# Altium PCB Sensor shoot.PcbDoc
Units mm, origin at the board's own origin, x right, y up, seen from the top; angles counter-clockwise.
Board outline 29.97 x 10.67 mm, 2 copper layers (Top Layer, Bottom Layer); 1 components, 3 nets, 10 pads, 0 vias.
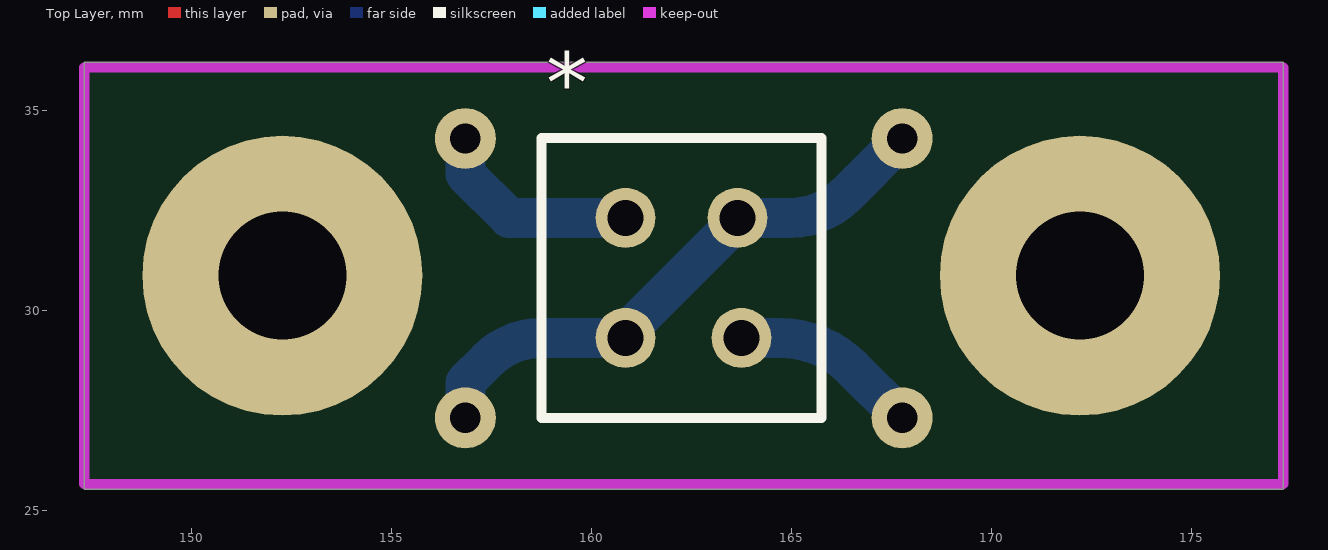
[diagram p0: Top Layer view]
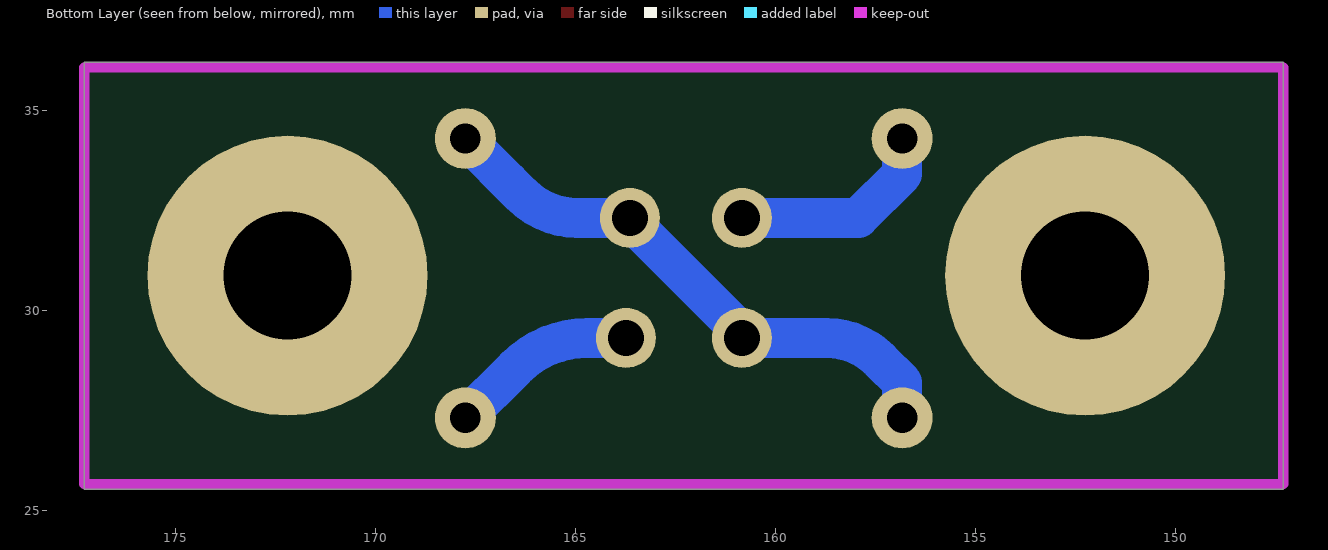
[diagram p1: Bottom Layer view, seen from below]

## Layer stack, top to bottom
Top Layer: signal copper 0.0356
Dielectric: dielectric 0.32, FR-4, Dk 4.8
Bottom Layer: signal copper 0.0356

## Board outline
147.32,25.527 147.32,36.195 177.292,36.195 177.292,25.527 147.32,25.527

## Design rules (kind name [scope] priority, off if disabled: settings)
Clearance [All] p1: gap=0.254
PolygonConnect [All] p1: connectstyle=Relief reliefconductorwidth=0.254 reliefentries=4 polygonreliefangle="90 Angle" airgapwidth=0.254
RoutingVias [All] p1: holewidth=0.711 width=1.27 viastyle="Through Hole" minholewidth=0.711 minwidth=1.27 maxholewidth=0.711 maxwidth=1.27
SolderMaskExpansion [All] p1: expansion=0.102
Width [All] p1: maxlimit=2 minlimit=0.254 preferedwidth=0.6 minimp=50.000000 maximp=50.000000 favimp=50.000000
28 further rules are at their usual default settings.

## Components (designator, comment, footprint, x,y, rotation, side; value= is the part's Value field where it differs from the comment)
* "CNY70" CNY70 158.75,27.305 r0 top

## Footprints (in the part's own frame and the unit in brackets; to place one, negate y for a bottom-side part, rotate by r counter-clockwise, add the part's x,y. Pads: shape width x height; smd on the part's side, far side on the other; paste and mask are expansions set on the pad)
CNY70 [mm]
  round 1.5 hole 0.9: 0(2.1,2) 1(2.1,5) 2(4.9,5) 3(5,2)
  silkscreen extent 0,0 7,7

## Free pads (board coordinates)
  round 7 hole 3.2: 0(152.273,30.861) 0(172.212,30.861)
  round 1.524 hole 0.762: 4(156.845,34.29) 5(167.767,27.305) 6(167.767,34.29) 7(156.845,27.305)

## Nets (pads, with @x,y where several pads share a name; then routed paths per layer and width w, separated by ;. In a path a pad name is that pad's centre, name@x,y a point inside that pad or via, vN(x,y) a via of type N, cw(c..) or ccw(c..) an arc to the next point about the centre after c; other vN are vias at no path point)
GND: *.0 *.2 pad.6 pad.7 | length 14.9
  Top Layer w1: *.2@163.65,32.105 *.2
  Bottom Layer w1: pad.7 156.845,28.194 157.401,28.75 cw(c158.742,27.408) 158.742,29.305 *.0 ; *.0@160.85,29.432 *.2@163.75,32.332 ; *.2 164.973,32.305 ccw(c164.973,34.258) 166.353,32.876 ; 166.688,33.21 166.354,32.877 ; pad.6 166.353,32.876
OUT: *.3 pad.5 | length 4.7
  Bottom Layer w1: *.3 164.715,29.305 cw(c164.715,26.765) 166.511,28.561 pad.5
VCC: *.1 pad.4 | length 5.3
  Bottom Layer w1: pad.4 156.845,33.401 157.941,32.305 *.1

## Keep-outs
Keep-Out Layer:
  lines w0.254: 147.32,25.654 147.32,36.068 177.292,36.068 177.292,25.654 147.32,25.654